# EAGLE board 200415 eAR ECU PX Sensor PTH R00 (EAGLE 7.6.0)
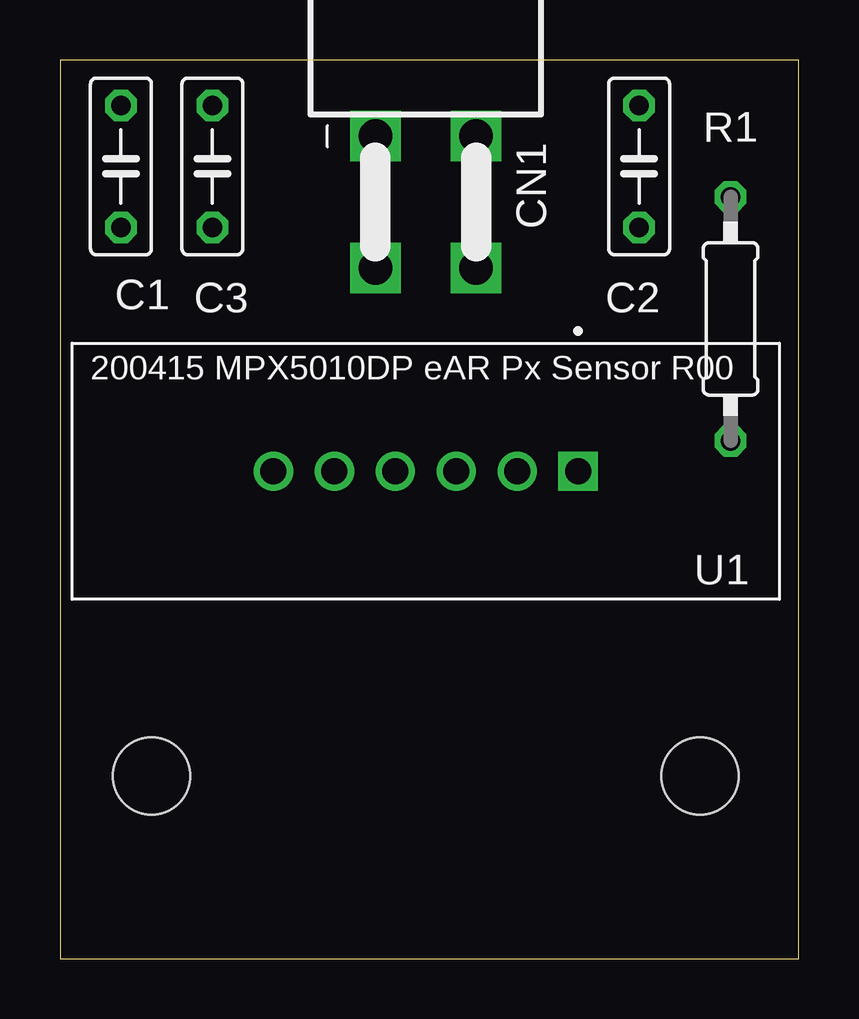
[diagram p0: board, top side]
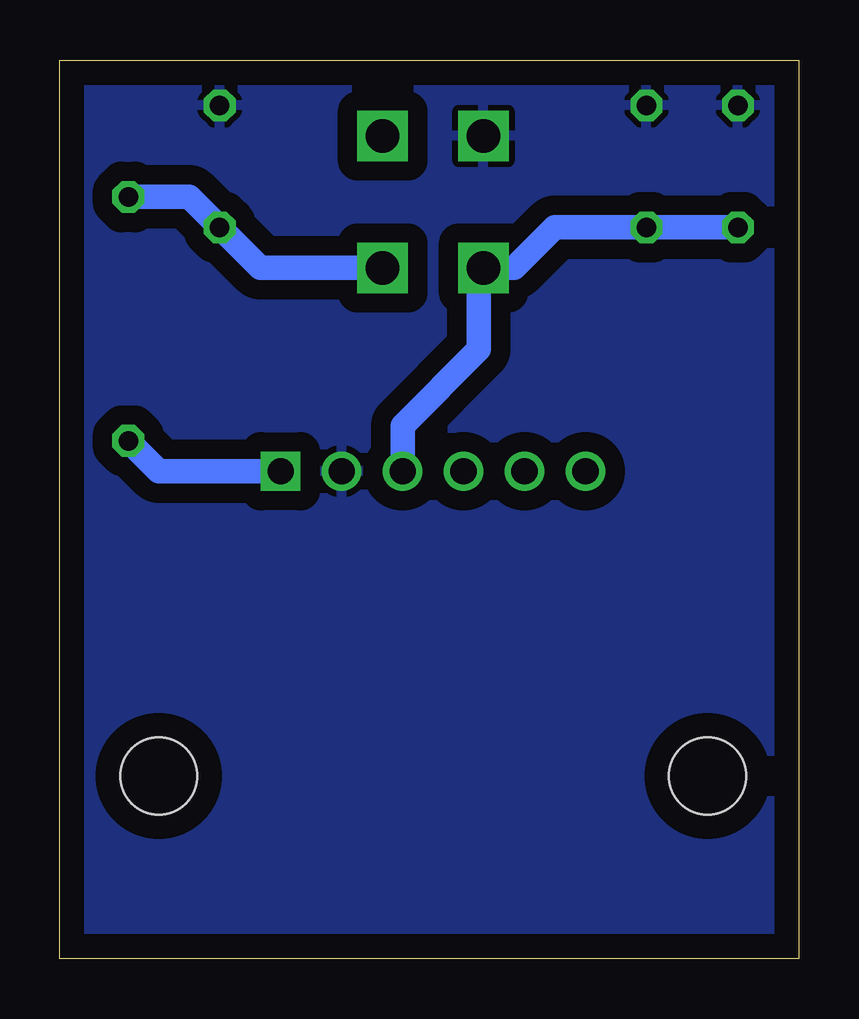
[diagram p1: board, bottom side, seen from below]

Size 30.79 x 37.45 mm. Coordinates in mm from the lower left corner, seen from the top.
Outline: 0,0 30.79,0 30.79,37.45 0,37.45 0,0
Copper layers (1*16): Top 0.035mm / dielectric 1.5mm / Bottom 0.035mm
Design rules "default": minimum track width 10mil, minimum drill 24mil, track to track 8mil, track to pad 8mil, pad to pad 8mil, via to via 8mil, smd to smd 8mil, copper to edge 40mil, drill to drill 8mil, minimum pad ring 10mil, minimum via ring 8mil, stop-mask expansion 4mil, vias tented up to drill 0mil, thermal gap 10mil
Holes 3.2 mm at 26.67,7.62 3.81,7.62

## Footprints (pad centres in the part's own frame; a part is rotated, then mirrored left to right if it is on the bottom)
C050-025X075 = drill 0.813 octagon: 1 -2.54,0; 2 2.54,0
MINIFIT4_90 = drill 1.4 square: 1 2.1,2.54; 2 -2.1,2.54; 3 2.1,8.04; 4 -2.1,8.04
0207/10 = drill 0.813 octagon: 1 -5.08,0; 2 5.08,0
XDCR_MPX5010DP = drill 1.09 pad 1.64 square: 1 -6.35,0 | drill 1.09 pad 1.64: 2 -3.81,0; 3 -1.27,0; 4 1.27,0; 5 3.81,0; 6 6.35,0

## Placement (x,y rotation side)
C1  .1  [C050-025X075]  2.54,33.02 90 top
C2  .1  [C050-025X075]  24.13,33.02 90 top
C3  .1  [C050-025X075]  6.35,33.02 90 top
CN1  MINIFIT4_90  [MINIFIT4_90]  15.24,36.83 180 top
R1  47K  [0207/10]  27.94,26.67 90 top
U1  MPX5010DP  [XDCR_MPX5010DP]  15.24,20.32 180 top

## Library data of the parts
C1-C3 R1 = rcl
CN1 = FlexCustom
U1 = MPX5010DP; AVAILABILITY: Unavailable; DESCRIPTION: Pressure Sensor 1.45PSI _10kPa_ Differential Male - 0.19 _4.93mm_ Tube 0.2 V ~ 4.7 V 6-SIP Module; MF: NXP USA; MP: MPX5010DP; PACKAGE: SIP-6 NXP Semiconductors; PRICE: None

## Nets
+5V: C1.1 C3.1 CN1.3 U1.3
GND: C1.2 C2.2 C3.2 CN1.1 U1.2
N$2: C2.1 CN1.4 R1.2
N$6: R1.1 U1.1

## Tracks (layer width: path | path; a pad name or v marks a point on that pad's centre or on a via)
+5V
  Bottom 1.016: C1.1 C3.1 10.16,30.48 11.85,28.79 CN1.3 13.34,28.59 13.34,25.4 16.51,22.23 U1.3
GND
  pour Bottom (isolate 0.813): 0,37.47 30.48,37.47 30.48,0 0,0
N$2
  Bottom 1.016: CN1.4 22.44,28.79 C2.1 25.4,31.75 R1.2
N$6
  Bottom 1.016: U1.1 26.67,20.32 R1.1

## Text on the board
tNames: 200415 MPX5010DP eAR Px Sensor R00